# EAGLE board microm_schem2 (EAGLE 9.6.2)
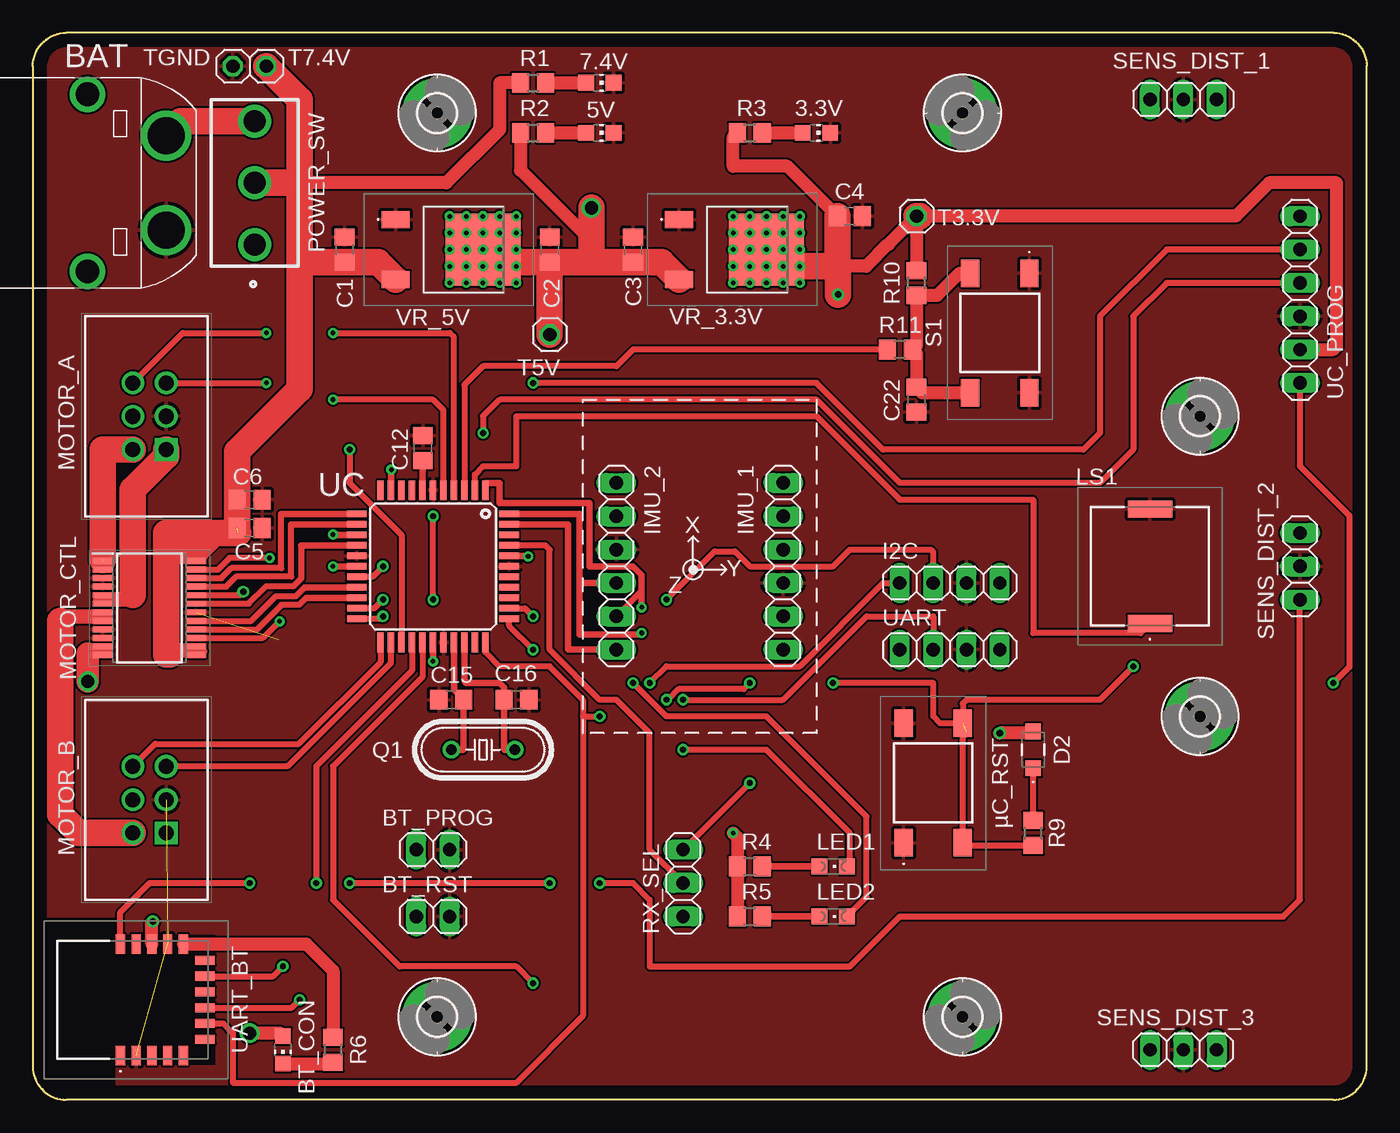
[diagram p0: board, top side]
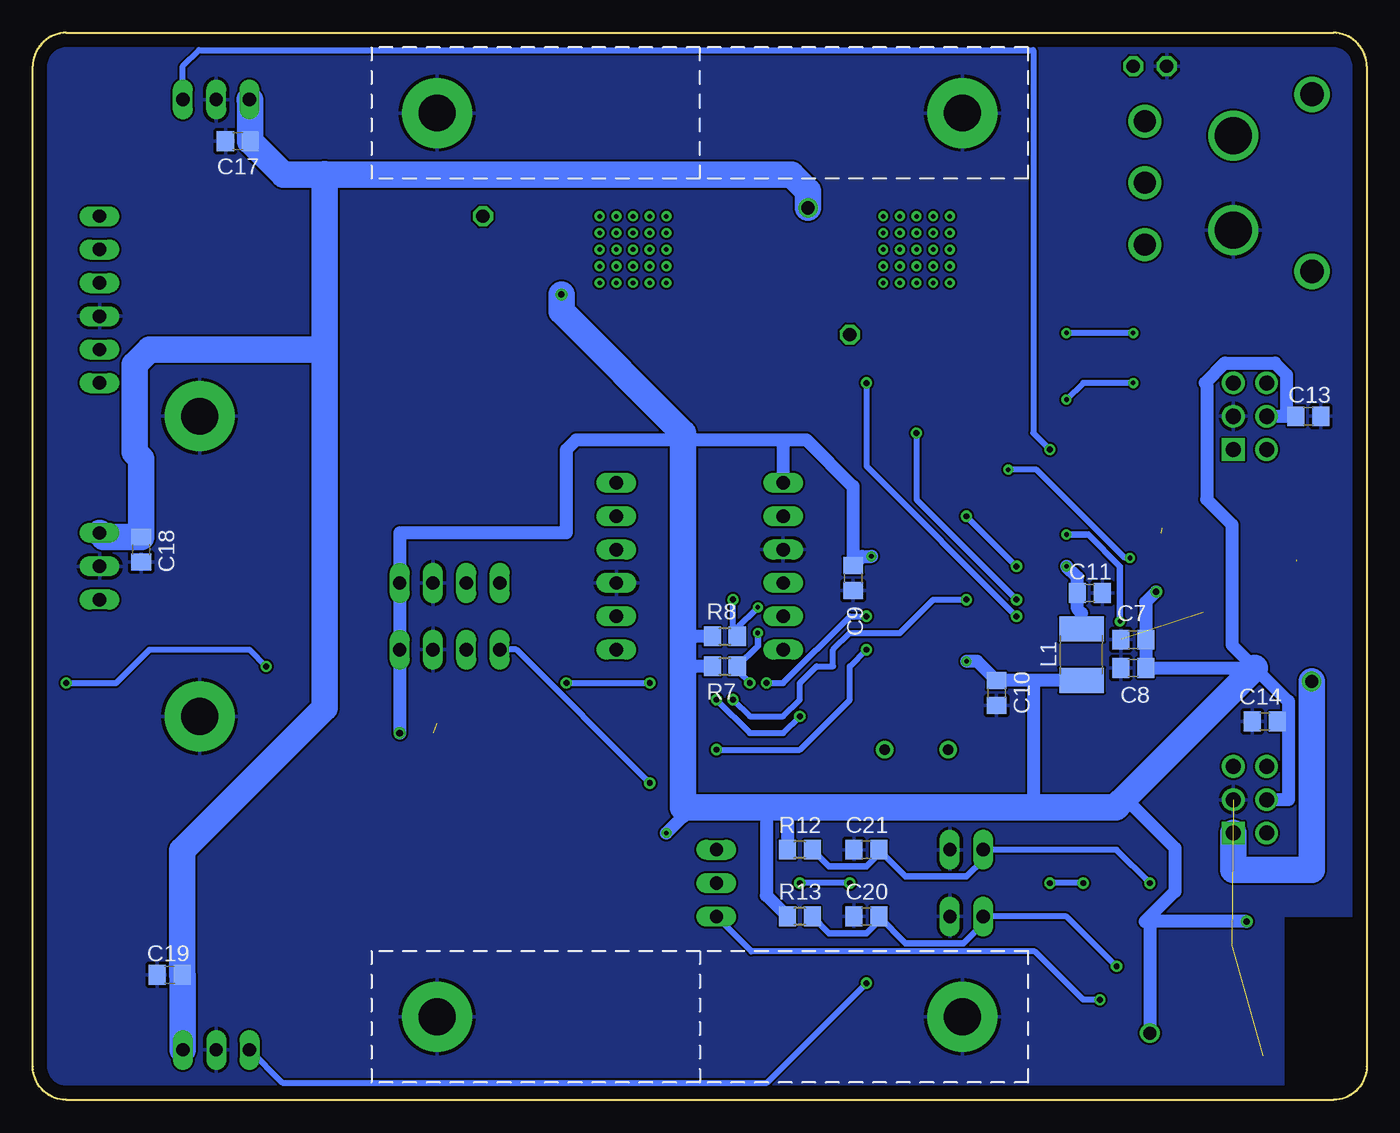
[diagram p1: board, bottom side, seen from below]

Size 101.6 x 81.28 mm. Coordinates in mm from the lower left corner, seen from the top.
Outline: 99.06,0 2.54,0 arc-90 0,2.54 0,78.74 arc-90 2.54,81.28 99.06,81.28 arc-90 101.6,78.74 101.6,2.54 arc-90 99.06,0
Copper layers (1*16): Top 0.035mm / dielectric 1.5mm / Bottom 0.035mm
Design rules "default": minimum track width 6mil, minimum drill 0.35mm, track to track 6mil, track to pad 6mil, pad to pad 6mil, via to via 6mil, smd to smd 6mil, copper to edge 40mil, drill to drill 6mil, minimum pad ring 10mil, minimum via ring 8mil, stop-mask expansion 4mil, vias tented up to drill 0mil, thermal gap 10mil

## Footprints (pad centres in the part's own frame; a part is rotated, then mirrored left to right if it is on the bottom)
CHIP-LED0805 = smd 1.2 x 1.2: A 0,-1.05; C 0,1.05
XT60PW-M = drill 2.8: + 3.6,0; - -3.6,0 | drill 1.8: P$3 -6.75,6; P$4 6.75,6
1X02 = drill 1.016 long: 1 -1.27,0; 2 1.27,0
C0805 = smd 1.3 x 1.5: 1 -0.95,0; 2 0.95,0
PMEG4010ER115 = smd 1.2 x 1.2: 1 -1.4,0; 2 1.4,0
2,8-PAD = drill 2.8 pad 5.334: B2,8 0,0
1X04 = drill 1.016 long: 1 -3.81,0; 2 -1.27,0; 3 1.27,0; 4 3.81,0
1X06 = drill 1.016 long: 1 -6.35,0; 2 -3.81,0; 3 -1.27,0; 4 1.27,0; 5 3.81,0; 6 6.35,0
L1812 = smd 1.9 x 3.4: 1 -1.95,0; 2 1.95,0
CHIPLED_0805 = smd 1.2 x 1.2: A 0,-1.05; C 0,1.05
CPT9019ASMTTR = smd 1.3 x 3.4: 1 -4.35,0; 2 4.35,0
SHDR6W67P254_2X3_1524X916X922P = drill 1.15 pad 1.725 square: 1 0,0 | drill 1.15 pad 1.725: 2 0,2.54; 3 2.54,0; 4 2.54,2.54; 5 5.08,0; 6 5.08,2.54
SOP65P760X160-24N = smd 1.525 x 0.45: 1 -3.562,3.575; 2 -3.562,2.925; 3 -3.562,2.275; 4 -3.562,1.625; 5 -3.562,0.975; 6 -3.562,0.325; 7 -3.562,-0.325; 8 -3.562,-0.975; 9 -3.562,-1.625; 10 -3.562,-2.275; 11 -3.562,-2.925; 12 -3.562,-3.575; 13 3.562,-3.575; 14 3.562,-2.925; 15 3.562,-2.275; 16 3.562,-1.625; 17 3.562,-0.975; 18 3.562,-0.325; 19 3.562,0.325; 20 3.562,0.975; 21 3.562,1.625; 22 3.562,2.275; 23 3.562,2.925; 24 3.562,3.575
1000-SERIES(SPDT) = drill 1.68 pad 2.48: 1 0,-4.7; 2 0,0; 3 0,4.7
HC49/S = drill 0.813: 1 -2.413,0; 2 2.413,0
R0805 = smd 1.3 x 1.5: 1 -0.95,0; 2 0.95,0
1X03 = drill 1.016 long: 1 -2.54,0; 2 0,0; 3 2.54,0
TS046650BK100SMTTR = smd 2.1 x 1.4: 1 -4.55,2.25; 2 -4.55,-2.25; 3 4.55,2.25; 4 4.55,-2.25
1X01 = drill 1.016 octagon: 1 0,0
RN4871IRM140 = smd 1.5 x 0.7: 1 -4.25,0.95; 2 -4.25,-0.25; 3 -4.25,-1.45; 4 -4.25,-2.65; 5 -4.25,-3.85; 12 4.25,-3.85; 13 4.25,-2.65; 14 4.25,-1.45; 15 4.25,-0.25; 16 4.25,0.95 | smd 0.7 x 1.5: 6 -3,-5.5; 7 -1.8,-5.5; 8 -0.6,-5.5; 9 0.6,-5.5; 10 1.8,-5.5; 11 3,-5.5
TQFP44 = smd 1.5 x 0.5: 1 -5.8,4; 2 -5.8,3.2; 3 -5.8,2.4; 4 -5.8,1.6; 5 -5.8,0.8; 6 -5.8,0; 7 -5.8,-0.8; 8 -5.8,-1.6; 9 -5.8,-2.4; 10 -5.8,-3.2; 11 -5.8,-4; 23 5.8,-4; 24 5.8,-3.2; 25 5.8,-2.4; 26 5.8,-1.6; 27 5.8,-0.8; 28 5.8,0; 29 5.8,0.8; 30 5.8,1.6; 31 5.8,2.4; 32 5.8,3.2; 33 5.8,4 | smd 0.5 x 1.5: 12 -4,-5.8; 13 -3.2,-5.8; 14 -2.4,-5.8; 15 -1.6,-5.8; 16 -0.8,-5.8; 17 0,-5.8; 18 0.8,-5.8; 19 1.6,-5.8; 20 2.4,-5.8; 21 3.2,-5.8; 22 4,-5.8; 34 4,5.8; 35 3.2,5.8; 36 2.4,5.8; 37 1.6,5.8; 38 0.8,5.8; 39 0,5.8; 40 -0.8,5.8; 41 -1.6,5.8; 42 -2.4,5.8; 43 -3.2,5.8; 44 -4,5.8
LM1117DTX33NOPB = smd 2.15 x 1.3: 1 -4.122,2.285; 3 -4.122,-2.285 | smd 5.7 x 5.5: 4 2.543,0
LM78M05CDT = smd 2.15 x 1.3: 1 -4.122,2.285; 2 -4.122,-2.285 | smd 5.7 x 5.5: 3 2.543,0

## Placement (x,y rotation side)
3.3V  green, 2mA, 3V  [CHIP-LED0805]  59.69,73.66 270 top
5V  green, 2mA, 3V  [CHIP-LED0805]  43.18,73.66 270 top
7.4V  green, 2mA, 3V  [CHIP-LED0805]  43.18,77.47 270 top
BAT  XT60PW-M  [XT60PW-M]  10.16,69.85 90 top
BT_CON  blue, 2mA, 3V  [CHIP-LED0805]  19.05,3.81 180 top
BT_PROG  [1X02]  30.48,19.05 0 top
BT_RST  [1X02]  30.48,13.97 0 top
C1  10uF, tantalum  [C0805]  23.75,64.77 90 top
C2  22uF, tantalum, esr 0.3-22Ω  [C0805]  39.37,64.77 90 top
C3  10uF, tantalum  [C0805]  45.72,64.77 90 top
C4  22uF, tantalum, esr 0.3-22Ω  [C0805]  62.23,67.31 0 top
C5  100nF  [C0805]  16.51,43.56 0 top
C6  10uF  [C0805]  16.51,45.72 0 top
C7  100nF  [C0805]  17.78,35.05 180 bottom
C8  10uF  [C0805]  17.78,32.89 180 bottom
C9  100nF, 10-20V, low-esr  [C0805]  39.12,39.75 270 bottom
C10  100nF, 10-20V, low-esr  [C0805]  28.19,30.99 270 bottom
C11  100nF, 10-20V, low-esr  [C0805]  21.08,38.61 180 bottom
C12  10uF, 10-20V, low-esr  [C0805]  29.72,49.66 270 top
C13  100nF, 10-20V, low-esr  [C0805]  4.45,52.07 0 bottom
C14  100nF, 10-20V, low-esr  [C0805]  7.75,28.83 180 bottom
C15  20pF, low-esr, ceramic  [C0805]  31.88,30.48 180 top
C16  20pF, low-esr, ceramic  [C0805]  36.83,30.48 0 top
C17  10 uF  [C0805]  85.98,73.03 180 bottom
C18  10 uF  [C0805]  93.34,41.91 270 bottom
C19  10 uF  [C0805]  91.19,9.53 180 bottom
C20  1uF  [C0805]  38.1,13.97 180 bottom
C21  1uF  [C0805]  38.1,19.05 180 bottom
C22  100nF  [C0805]  67.31,53.34 270 top
D2  PMEG4010ER,115  [PMEG4010ER115]  76.2,26.67 90 top
H3  MOUNT-PAD-ROUND2.8  [2,8-PAD]  30.8,75.17 0 top
H4  MOUNT-PAD-ROUND2.8  [2,8-PAD]  70.8,75.17 90 top
H5  MOUNT-PAD-ROUND2.8  [2,8-PAD]  30.8,6.33 0 top
H6  MOUNT-PAD-ROUND2.8  [2,8-PAD]  70.8,6.33 0 top
H7  MOUNT-PAD-ROUND2.8  [2,8-PAD]  88.9,52.07 0 top
H8  MOUNT-PAD-ROUND2.8  [2,8-PAD]  88.9,29.21 0 top
I2C  [1X04]  69.85,39.37 0 top
IMU_1  [1X06]  57.15,40.64 270 top
IMU_2  [1X06]  44.45,40.64 270 top
L1  47uH  [L1812]  21.72,33.91 270 bottom
LED1  red, 2mA, 2.1V  [CHIPLED_0805]  60.96,17.78 270 top
LED2  red, 2mA, 2.1V  [CHIPLED_0805]  60.96,13.97 270 top
LS1  CPT-9019A-SMT-TR  [CPT9019ASMTTR]  85.09,40.64 90 top
MOTOR_A  1761681-1  [SHDR6W67P254_2X3_1524X916X922P]  10.16,49.53 90 top
MOTOR_B  1761681-1  [SHDR6W67P254_2X3_1524X916X922P]  10.16,20.32 90 top
MOTOR_CTL  TB6612FNG,C,8,EL  [SOP65P760X160-24N]  8.89,37.47 0 top
POWER_SW  1101M2S3CQE2  [1000-SERIES(SPDT)]  16.89,69.85 0 top
Q1  16 MHz  [HC49/S]  34.29,26.67 0 top
R1  2.7kΩ  [R0805]  38.1,77.47 0 top
R2  1.2kΩ  [R0805]  38.1,73.66 0 top
R3  180Ω  [R0805]  54.61,73.66 0 top
R4  680Ω  [R0805]  54.61,17.78 0 top
R5  680Ω  [R0805]  54.61,13.97 0 top
R6  180Ω  [R0805]  22.86,3.81 270 top
R7  2.2kΩ  [R0805]  48.9,33.02 0 bottom
R8  2.2kΩ  [R0805]  48.9,35.31 0 bottom
R9  10kΩ  [R0805]  76.2,20.32 90 top
R10  10kΩ  [R0805]  67.31,62.23 90 top
R11  1kΩ  [R0805]  66.04,57.15 180 top
R12  10kΩ  [R0805]  43.18,19.05 180 bottom
R13  10kΩ  [R0805]  43.18,13.97 180 bottom
RX_SEL  [1X03]  49.53,16.51 90 top
S1  TS04-66-50-BK-100-SMT-TR  [TS046650BK100SMTTR]  73.66,58.42 270 top
SENS_DIST_1  [1X03]  87.63,76.2 0 top
SENS_DIST_2  [1X03]  96.52,40.64 270 top
SENS_DIST_3  [1X03]  87.63,3.81 180 top
T3.3V  [1X01]  67.31,67.31 0 top
T5V  [1X01]  39.37,58.29 0 top
T7.4V  [1X01]  17.78,78.74 0 top
TGND  [1X01]  15.24,78.74 0 top
UART  [1X04]  69.85,34.29 0 top
UART_BT  RN4871-I_RM140  [RN4871IRM140]  7.62,7.62 90 top
UC  DSPIC33FJ64MC804-PT  [TQFP44]  30.48,40.64 270 top
UC_PROG  [1X06]  96.52,60.96 90 top
VR_3.3V  LM1117DTX-3.3_NOPB  [LM1117DTX33NOPB]  53.34,64.77 0 top
VR_5V  LM1117DTX-5.0_NOPB  [LM78M05CDT]  31.75,64.77 0 top
µC_RST  TS04-66-50-BK-100-SMT-TR  [TS046650BK100SMTTR]  68.58,24.13 90 top

## Library data of the parts
3.3V 5V 7.4V BT_CON LED1 LED2 = led
BAT = amass
BT_PROG BT_RST I2C IMU_1 IMU_2 RX_SEL SENS_DIST_1-SENS_DIST_3 T3.3V T5V T7.4V TGND UART UC_PROG = pinhead
C1-C22 = rcl; SPICEPREFIX: C
D2 = SamacSys_Parts; DESCRIPTION: Nexperia 40V 1A, Diode, 2-Pin SOD-123 PMEG4010ER,115; HEIGHT: 1.1mm; MANUFACTURER_NAME: Nexperia; MANUFACTURER_PART_NUMBER: PMEG4010ER,115; MOUSER_PART_NUMBER: 771-PMEG4010ER115; MOUSER_PRICE-STOCK: https://www.mouser.co.uk/ProductDetail/Nexperia/PMEG4010ER115?qs=LMSg3oBIm%2FgUK9jNVC9MaQ%3D%3D
H3-H8 = holes
L1 = rcl; SPICEPREFIX: L
LS1 = SamacSys_Parts; ARROW_PART_NUMBER: CPT-9019A-SMT-TR; ARROW_PRICE-STOCK: https://www.arrow.com/en/products/cpt-9019a-smt-tr/same-sky-(formerly-cui-devices)?utm_currency=USD&region=nac; DESCRIPTION: 9 mm, 25 Vp-p Vdc, 75 dB, Surface Mount (SMT), Piezo Audio Transducer Buzzer; HEIGHT: 2.1mm; MANUFACTURER_NAME: Same Sky; MANUFACTURER_PART_NUMBER: CPT-9019A-SMT-TR; MOUSER_PART_NUMBER: 179-CPT-9019A-SMT-TR; MOUSER_PRICE-STOCK: https://www.mouser.co.uk/ProductDetail/Same-Sky/CPT-9019A-SMT-TR?qs=3Rah4i%252BhyCH9W9p08uaaRg%3D%3D
MOTOR_A MOTOR_B = SamacSys_Parts; DESCRIPTION: Body Features: Primary Product Color Black | Connector Profile Low | Daisy Chain With | Configuration Features: PCB Mount Orientation Vertical | Number of Positions 6 | Number of Rows 2 | Contact Features: Contact Mating Area Plating Material Thickness 15 MICIN | Contact Type Pin | PCB Contact Termination Area Plating Material Tin | Contact Base Material Phosphor Bronze | PCB Contact Termination Area Plating Material Thickness 100 MICIN | Contact Current Rating (Max) 1 AMP | Contact Underplating Material Ni; HEIGHT: 9.22mm; MANUFACTURER_NAME: TE Connectivity; MANUFACTURER_PART_NUMBER: 1761681-1; MOUSER_PART_NUMBER: 571-1761681-1; MOUSER_PRICE-STOCK: https://www.mouser.co.uk/ProductDetail/TE-Connectivity/1761681-1?qs=BqFpTYCQ3dLAeZ2wzdz7aw%3D%3D
MOTOR_CTL = SamacSys_Parts; DESCRIPTION: otor / Motion / Ignition Controllers & Drivers Brush Motor Driver IC; HEIGHT: 1.6mm; MANUFACTURER_NAME: Toshiba; MANUFACTURER_PART_NUMBER: TB6612FNG,C,8,EL; MOUSER_PART_NUMBER: 757-TB6612FNGC8EL; MOUSER_PRICE-STOCK: https://www.mouser.co.uk/ProductDetail/Toshiba/TB6612FNGC8EL?qs=rsevcuukUAy2UalRuv4E%2FQ%3D%3D
POWER_SW = SamacSys_Parts; ARROW_PART_NUMBER: 1101M2S3CQE2; ARROW_PRICE-STOCK: https://www.arrow.com/en/products/1101m2s3cqe2/ck?utm_currency=USD&region=europe; DESCRIPTION: 1101M2S3CQE2 (Slide Switches); HEIGHT: mm; MANUFACTURER_NAME: C & K COMPONENTS; MANUFACTURER_PART_NUMBER: 1101M2S3CQE2; MOUSER_PART_NUMBER: 611-1101M2S3CQE2; MOUSER_PRICE-STOCK: https://www.mouser.co.uk/ProductDetail/CK/1101M2S3CQE2?qs=C4UUOezh8MStnZqkTHGAfQ%3D%3D
Q1 = crystal; OC_FARNELL: 1667008; OC_NEWARK: unknown
R1-R13 = rcl; SPICEPREFIX: R
S1 µC_RST = SamacSys_Parts; DESCRIPTION: 6 x 6 mm, 5 mm Actuator Height, 160 gf, Black, Surface Mount, SPST, Tactile Switch; HEIGHT: 5mm; MANUFACTURER_NAME: Same Sky; MANUFACTURER_PART_NUMBER: TS04-66-95-BK-160-SMT-TR; MOUSER_PART_NUMBER: 179-TS046695BK160SMR; MOUSER_PRICE-STOCK: https://www.mouser.co.uk/ProductDetail/Same-Sky/TS04-66-95-BK-160-SMT-TR?qs=VJzv269c%252BPZ4T0IrjAQJjg%3D%3D
UART_BT = SamacSys_Parts; ARROW_PART_NUMBER: RN4871-I/RM140; ARROW_PRICE-STOCK: https://www.arrow.com/en/products/rn4871-irm140/microchip-technology?utm_currency=USD&region=nac; DESCRIPTION: Bluetooth Modules (802.15.1) Bluetooth Low Energy BLE Module, Shielded, Antenna, ASCII Interface, 9x11.5mm; HEIGHT: 2.1mm; MANUFACTURER_NAME: Microchip; MANUFACTURER_PART_NUMBER: RN4871-I/RM140; MOUSER_PART_NUMBER: 579-RN4871-I/RM140; MOUSER_PRICE-STOCK: https://www.mouser.co.uk/ProductDetail/Microchip-Technology/RN4871-I-RM140?qs=BJlw7L4Cy79OHrwBC2yoPQ%3D%3D
UC = microchip-dspic33fjxxmc
VR_3.3V = SamacSys_Parts; ARROW_PART_NUMBER: LM1117DTX-3.3/NOPB; ARROW_PRICE-STOCK: https://www.arrow.com/en/products/lm1117dtx-3.3nopb/texas-instruments?utm_currency=USD&region=nac; DESCRIPTION: Space saving 800-mA low-dropout linear regulator with internal current limit; HEIGHT: mm; MANUFACTURER_NAME: Texas Instruments; MANUFACTURER_PART_NUMBER: LM1117DTX-3.3/NOPB; MOUSER_PART_NUMBER: 926-LM1117DTX3.3NOPB; MOUSER_PRICE-STOCK: https://www.mouser.co.uk/ProductDetail/Texas-Instruments/LM1117DTX-3.3-NOPB?qs=X1J7HmVL2ZFMDtR97FJi7A%3D%3D
VR_5V = SamacSys_Parts; ARROW_PART_NUMBER: LM1117DTX-5.0/NOPB; ARROW_PRICE-STOCK: https://www.arrow.com/en/products/lm1117dtx-5.0nopb/texas-instruments?utm_currency=USD&region=nac; DESCRIPTION: Space saving 800-mA low-dropout linear regulator with internal current limit; HEIGHT: mm; MANUFACTURER_NAME: Texas Instruments; MANUFACTURER_PART_NUMBER: LM1117DTX-5.0/NOPB; MOUSER_PART_NUMBER: 926-LM1117DTX50NOPB; MOUSER_PRICE-STOCK: https://www.mouser.co.uk/ProductDetail/Texas-Instruments/LM1117DTX-5.0-NOPB?qs=X1J7HmVL2ZGetRa19U64lA%3D%3D

## Nets
+3V3: BT_CON.A C4.1 C7.1 C8.1 C9.1 C10.1 C13.1 C14.1 D2.2 I2C.4 IMU_2.1 L1.2 MOTOR_A.4 MOTOR_B.4 MOTOR_CTL.20 R3.1 R4.1 R5.1 R7.1 R8.1 R10.2 R12.2 R13.2 T3.3V.1 UART.4 UART_BT.14 UC.28 UC.40 UC_PROG.2 VR_3.3V.4
+5V: C2.1 C3.1 C17.1 C18.1 C19.1 R2.1 SENS_DIST_1.1 SENS_DIST_2.1 SENS_DIST_3.1 T5V.1 VR_3.3V.3 VR_5V.3
+7V4: C1.1 C5.1 C6.1 MOTOR_CTL.13 MOTOR_CTL.14 MOTOR_CTL.24 POWER_SW.2 R1.1 T7.4V.1 VR_5V.2
BT_PROG: BT_PROG.1 C21.1 R12.1 UART_BT.16
BT_RESET: BT_RST.1 C20.1 R13.1 UART_BT.10
BT_STATUS: R6.1 UART_BT.12
BUTTON1: R11.2 UC.3
BUZZ_PWM: LS1.1 UC.2
GND: 3.3V.C 5V.C 7.4V.C BAT.- BT_PROG.2 BT_RST.2 C1.2 C2.2 C3.2 C4.2 C5.2 C6.2 C7.2 C8.2 C9.2 C10.2 C11.1 C12.1 C13.2 C14.2 C15.2 C16.2 C17.2 C18.2 C19.2 C20.2 C21.2 C22.2 H3.B2,8 H4.B2,8 H5.B2,8 H6.B2,8 H7.B2,8 H8.B2,8 I2C.3 IMU_1.4 IMU_2.3 LS1.2 MOTOR_A.3 MOTOR_B.3 MOTOR_CTL.3 MOTOR_CTL.4 MOTOR_CTL.9 MOTOR_CTL.10 MOTOR_CTL.18 S1.1 S1.3 SENS_DIST_1.2 SENS_DIST_2.2 SENS_DIST_3.2 TGND.1 UART.3 UART_BT.2 UART_BT.13 UC.6 UC.16 UC.29 UC.39 UC_PROG.3 VR_3.3V.1 VR_5V.1 µC_RST.1 µC_RST.3
I2C_SCL: I2C.1 IMU_2.4 R7.2 UC.44
I2C_SDA: I2C.2 IMU_2.5 R8.2 UC.1
IMU_INT: IMU_2.6 UC.43
LED1: LED1.C UC.34
LED2: LED2.C UC.35
M_STDBY: MOTOR_CTL.19 UC.15
MA_DIR1: MOTOR_CTL.21 UC.13
MA_DIR2: MOTOR_CTL.22 UC.12
MA_ENC_A: MOTOR_A.6 UC.4
MA_ENC_B: MOTOR_A.5 UC.5
MA_OUT1: MOTOR_A.2 MOTOR_CTL.1 MOTOR_CTL.2
MA_OUT2: MOTOR_A.1 MOTOR_CTL.5 MOTOR_CTL.6
MA_PWM: MOTOR_CTL.23 UC.10
MB_DIR1: MOTOR_CTL.17 UC.19
MB_DIR2: MOTOR_CTL.16 UC.20
MB_ENC_A: MOTOR_B.5 UC.24
MB_ENC_B: MOTOR_B.6 UC.23
MB_OUT1: MOTOR_B.1 MOTOR_CTL.11 MOTOR_CTL.12
MB_OUT2: MOTOR_B.2 MOTOR_CTL.7 MOTOR_CTL.8
MB_PWM: MOTOR_CTL.15 UC.14
MCLR: R9.1 UC.18 UC_PROG.1 µC_RST.2 µC_RST.4
N$1: BT_CON.C R6.2
N$2: BAT.+ POWER_SW.3
N$3: LED1.A R4.2
N$4: 7.4V.A R1.2
N$5: C11.2 L1.1 UC.17
N$6: C22.1 R10.1 R11.1 S1.2 S1.4
N$7: D2.1 R9.2
N$8: LED2.A R5.2
N$16: 5V.A R2.2
N$17: 3.3V.A R3.2
OSC1: C15.1 Q1.1 UC.30
OSC2: C16.1 Q1.2 UC.31
PG_EC1: UC.22 UC_PROG.5
PG_ED1: UC.21 UC_PROG.4
SENS_DIST_1: SENS_DIST_1.3 UC.25
SENS_DIST_2: SENS_DIST_2.3 UC.26
SENS_DIST_3: SENS_DIST_3.3 UC.27
UART_BT_RX: RX_SEL.1 UART_BT.8
UART_BT_RX_IND: UART_BT.6
UART_DBG_RX: RX_SEL.3 UART.1
UART_RX: RX_SEL.2 UC.41
UART_TX: UART.2 UART_BT.7 UC.33
VCAP/VDDCORE: C12.2 UC.7

## Tracks (layer width: path | path; a pad name or v marks a point on that pad's centre or on a via)
+3V3  (via drill 0.35, 0.35 pad 0.55, 0.5 pad 0.55, 1)
  Top 0.45: MOTOR_CTL.20 15.77,38.44 | T3.3V.1 67.56,67.32
  Top 0.5: 15.77,38.44 v16.04,38.7
  Top 0.508: UC.40 37.68,41.44 v37.72,41.4 | UC.28 v30.48,33.4
  Top 1: 60.96,63.5 61.28,63.82 | C4.1 57.47,71.12 53.34,71.12 53.34,73.34 R3.1 | 60.96,63.5 63.48,63.5 65.15,65.17 65.17,65.17 T3.3V.1 R10.2 | UC_PROG.2 99.06,57.15 99.31,57.4 99.31,69.85 94.17,69.85 91.64,67.32 67.56,67.32 | 60.96,63.5 61.34,63.12 | D2.2 76.07,27.94 v73.66,27.94 | UART_BT.14 9.07,13.52 v9.14,13.59 | v53.34,20.32 53.66,20 R4.1 R5.1 | BT_CON.A 18.83,5.08 v16.51,5.08
  Top 2: VR_3.3V.4 57.15,63.5 60.96,63.5 | C4.1 61.28,63.82 | T3.3V.1 67.55,67.31 67.56,67.32 | 61.34,63.12 v61.34,61.34
  Bottom 1: C7.1 16.76,35.05 | 6.11,52.07 6.11,55.24 6.99,56.12 10.79,56.12 12.3,54.61 12.19,54.5 12.19,45.74 10.27,43.81 10.27,34.65 8.51,32.89 | 5.97,28.83 5.97,30.35 8.51,32.89 | MOTOR_B.4 5.97,22.86 5.97,28.45 | v73.66,27.94 UART.4 I2C.4 73.66,43.18 60.96,43.18 60.96,49.53 60.2,50.29 52.07,50.29 44.45,50.29 | C14.1 6.35,28.83 | 6.35,28.83 5.97,28.83 | C13.1 6.11,52.07 | 6.11,52.07 MOTOR_A.4 7.62,51.67 | 6.35,28.83 5.97,28.45 | 5.97,28.83 5.97,28.45 | v16.04,38.7 16.83,37.91 C7.1 | C7.1 C8.1 8.51,32.89 | 21.79,31.88 L1.2 25.4,31.96 | v37.72,41.4 38.41,41.4 C9.1 39.12,46.74 42.67,50.29 44.45,50.29 | 25.4,31.96 28.17,31.96 C10.1 29.66,33.4 v30.48,33.4 | v9.14,13.59 16.89,13.59 16.51,13.97 | 16.51,13.97 14.61,15.88 14.61,19.18 18.16,22.73 18.67,22.73 | R8.1 51.82,35.31 52.07,35.05 | R7.1 52.07,33.02 | 25.4,31.96 25.4,22.29 | 44.45,50.29 IMU_2.1 | 45.72,22.29 45.72,15.56 R13.2 | 44.45,22.29 44.13,21.97 R12.2 | 52.07,22.29 52.07,21.59 v53.34,20.32 | 16.51,13.97 v16.51,5.08
  Bottom 2: v61.34,61.34 61.34,60.07 52.07,50.8 52.07,50.29 52.07,35.05 52.07,33.02 52.07,22.29 45.72,22.29 44.45,22.29 25.4,22.29 19.12,22.29 18.67,22.73 8.51,32.89
+5V  (via drill 1)
  Top 1: R2.1 37.15,70.8 42.55,65.41 42.55,64.45 41.91,63.82
  Top 2: VR_5V.3 35.24,63.82 C2.1 | C2.1 41.91,63.82 42.55,63.82 | 42.55,63.82 C3.1 47.88,63.82 VR_3.3V.3 | C2.1 T5V.1 | v42.55,67.94 42.55,63.82
  Bottom 2: 79.38,57.15 92.71,57.15 93.84,56.02 93.84,49.33 93.34,48.83 C18.1 96.2,42.86 SENS_DIST_2.1 | 79.38,57.15 79.38,29.84 90.24,18.98 C19.1 90.17,9.46 SENS_DIST_3.1 | v42.55,67.94 42.55,69.22 43.81,70.48 79.38,70.48 | 79.38,57.15 79.38,70.48 | 79.38,70.48 79.38,70.49 | 79.38,70.48 82.49,70.48 C17.1 85.03,76.14 SENS_DIST_1.1
+7V4  (1 unrouted)
  Top 0.45: 10.16,34.29 10.41,34.54 MOTOR_CTL.14 12.45,34.29 | MOTOR_CTL.13 10.54,33.89 | 10.54,33.89 10.43,33.89 | MOTOR_CTL.13 12.45,34.29 | 12.45,34.29 10.94,34.29 10.54,33.89 | MOTOR_CTL.13 12.72,34.16 13.08,34.16 | 12.7,43.18 12.45,42.93 12.45,41.78 MOTOR_CTL.24 12.43,41.02 10.16,41.02
  Top 0.5: 15.16,43.96 C5.1
  Top 1: R1.1 35.56,77.47 35.56,73.91 31.5,69.85 20.32,69.85
  Top 1.6: 10.43,33.89 10.41,33.91
  Top 1.7: 13.97,43.18 12.57,41.78 12.45,41.78 12.2,42.04 10.16,42.04
  Top 2: T7.4V.1 20.32,76.2 20.32,69.85 | 20.32,69.85 POWER_SW.2 | 20.32,63.5 20.32,54.15 15.56,49.39 C6.1 C5.1 | 20.32,63.5 20.32,69.85 | 10.41,33.91 10.16,33.91 10.16,34.29 10.16,41.02 10.16,42.04 10.16,43.18 12.7,43.18 13.97,43.18 15.66,43.18 | 20.32,63.5 20.64,63.82 C1.1 26.29,63.82 VR_5V.2
BT_PROG  (via drill 0.45)
  Top 0.45: UART_BT.16 6.67,14.29 8.89,16.51 v16.51,16.51
  Bottom 0.45: v16.51,16.51 19.05,19.05 BT_PROG.1
  Bottom 0.5: R12.1 42.11,19.17
  Bottom 0.508: R12.1 40.96,17.78 38.1,17.78 37.15,18.73 C21.1 35.12,17.02 30.48,17.02 29.21,18.29 BT_PROG.1
BT_RESET  (via drill 0.45)
  Top 0.45: UART_BT.10 18.31,9.42 v19.05,10.16
  Bottom 0.45: v19.05,10.16 22.86,13.97 BT_RST.1
  Bottom 0.5: 37.15,14.04 C20.1 | R13.1 42.11,14.09
  Bottom 0.508: R13.1 40.96,12.7 38.1,12.7 37.15,13.65 C20.1 35.12,11.94 30.73,11.94 29.21,13.46 BT_RST.1
BT_STATUS
  Top 1: UART_BT.12 20.83,11.87 22.86,9.84 R6.1
BUTTON1
  Top 0.45: R11.2 45.72,57.15 44.45,55.88 34.29,55.88 32.88,54.47 UC.3
BUZZ_PWM
  Top 0.45: UC.2 33.68,47.65 34.29,48.26 36.83,48.26 36.83,52.07 59.69,52.07 66.04,45.72 76.2,45.72 76.2,35.56 84.36,35.56 LS1.1
GND  (3 unrouted)
  pour Bottom: 2.54,81.28 arc90 0,78.74 0,16.51 0,15.24 0,13.97 6.35,13.97 6.35,0 99.06,0 arc90 101.6,2.54 101.6,78.74 arc90 99.06,81.28 97.79,81.28
  pour Top: 0,78.74 0,13.97 6.35,13.97 6.35,12.7 13.97,12.7 13.97,2.54 6.35,2.54 6.35,0 99.06,0 arc90 101.6,2.54 101.6,3.81 101.6,78.74 arc90 99.06,81.28 97.79,81.28 2.54,81.28 arc90
I2C_SCL  (via drill 0.35 pad 0.55, 0.45)
  Top 0.45: v46.99,31.75 48.26,33.02 58.42,33.02 64.77,39.37 I2C.1
  Top 0.5: UC.44 41.66,44.64 41.66,39.37 | 41.66,39.37 IMU_2.4 | v46.38,35.56 46.27,35.45 43.21,35.45 43.18,35.43 41.66,35.43 41.66,39.37
  Bottom 0.45: R7.2 47.95,32.7 v46.99,31.75
  Bottom 0.5: v46.38,35.56 46.38,34.59 R7.2
I2C_SDA  (via drill 0.35 pad 0.55, 0.45)
  Top 0.45: I2C.2 68.58,41.74 68.54,41.78 68.41,41.91 62.23,41.91 60.96,40.64 54.61,40.64 53.47,41.78 51.94,41.78 v48.26,38.1
  Top 0.5: IMU_2.5 46.38,38.76 | 46.38,38.76 46.38,39.98 45.72,40.64 42.42,40.64 42.42,45.47 35.56,45.47 35.56,46.99 34.48,46.99 UC.1 | v46.38,37.51 46.38,38.76
  Bottom 0.45: R8.2 48.26,35.62 v48.26,38.1
  Bottom 0.5: R8.2 47.95,35.94 v46.38,37.51
IMU_INT
  Top 0.5: UC.43 40.75,43.84 40.75,34.31 40.77,34.29 IMU_2.6
LED1  (via drill 0.45)
  Top 0.45: LED1.C 62.23,18 62.23,20.32 55.88,26.67 v49.53,26.67 | v38.1,34.29 36.28,36.11 UC.34
  Bottom 0.45: v49.53,26.67 43.18,26.67 39.37,30.48 39.37,33.02 v38.1,34.29
LED2  (via drill 0.45)
  Top 0.45: LED2.C 63.5,15.46 63.5,21.59 55.88,29.21 48.26,29.21 v45.72,31.75 | UC.35 37.49,37.44 v38.1,36.83
  Bottom 0.45: v38.1,36.83 39.37,36.83 44.45,31.75 v45.72,31.75
M_STDBY
  Top 0.45: 20.45,42.24 20.45,39.73 19.84,39.12 17.78,39.12 16.45,37.79 MOTOR_CTL.19
  Top 0.5: UC.15 20.45,42.24
MA_DIR1
  Top 0.45: MOTOR_CTL.21 14.74,39.09 15.5,39.85 19.68,39.85 19.68,43.84
  Top 0.5: 19.68,43.84 UC.13
MA_DIR2
  Top 0.45: MOTOR_CTL.22 14.36,39.74 15.12,40.5 18.92,40.5 18.92,44.64
  Top 0.5: 18.92,44.64 UC.12
MA_ENC_A  (via drill 0.35)
  Top 0.45: UC.4 32.08,58.09 31.75,58.42 v22.86,58.42 | MOTOR_A.6 11.43,58.42 v17.78,58.42
  Bottom 0.45: v17.78,58.42 v22.86,58.42
MA_ENC_B  (via drill 0.35)
  Top 0.45: MOTOR_A.5 v17.78,54.61 | UC.5 31.28,52.54 30.48,53.34 v22.86,53.34
  Bottom 0.45: v17.78,54.61 21.59,54.61 v22.86,53.34
MA_OUT1  (1 unrouted)
  Top 0.45: MOTOR_CTL.1 MOTOR_CTL.2
  Top 2: MOTOR_A.2 5.33,49.53 | 5.33,49.52 5.33,49.53 | 5.33,49.53 5.33,41.12
MA_OUT2
  Top 0.45: 7.31,37.79 MOTOR_CTL.6 5.33,38.1 | 7.62,38.44 MOTOR_CTL.5 5.33,38.1 | 5.33,38.1 7.62,38.1 | 5.33,38.1 4.83,38.1
  Top 0.5: 7.62,38.1 7.31,37.79
  Top 2: MOTOR_A.1 10.16,49.03 7.62,46.49 7.62,38.44
MA_PWM  (via drill 0.35 pad 0.55)
  Top 0.45: MOTOR_CTL.23 14.1,40.39 14.99,41.28 v18.03,41.28 v18.03,41.27
  Top 0.5: UC.10 27.28,47.98 v27.3,48.01
  Bottom 0.45: v27.3,48.01 25.15,48.01 18.41,41.27 v18.03,41.27
MB_DIR1
  Top 0.45: 20.71,39.04 20.02,38.35 18.5,38.35 17.61,37.47 | 17.61,37.47 | MOTOR_CTL.17 16.64,36.49 17.61,37.47
  Top 0.5: UC.19 20.71,39.04
MB_DIR2
  Top 0.45: 20.83,38.24 20.29,37.7 18.95,37.7 17.93,36.68 17.09,35.84 MOTOR_CTL.16
  Top 0.5: UC.20 20.83,38.24
MB_ENC_A
  Top 0.45: UC.24 27.28,33.28 19.4,25.4 MOTOR_B.5
MB_ENC_B
  Top 0.45: MOTOR_B.6 9.34,27.12 20.27,27.12 26.48,33.33 UC.23
MB_OUT1  (via drill 1)
  Top 0.45: 4.46,34.29 4.71,34.54 MOTOR_CTL.11 5.33,34.29 | 4.46,34.29 4.18,34.02 4.31,33.89 MOTOR_CTL.12 5.33,34.29 | 5.33,34.29 4.46,34.29 | 5.33,34.29 5.46,34.16 5.84,34.16
  Top 1.7: v4.19,31.88 v4.18,31.88 4.18,34.02
  Bottom 2: v4.19,31.88 4.19,17.53 10.16,17.53 MOTOR_B.1
MB_OUT2
  Top 0.45: MOTOR_CTL.7 2.02,37.14 | 2.09,36.49 MOTOR_CTL.8 5.33,36.83 | MOTOR_CTL.7 5.33,36.83 | 5.33,36.83 2.54,36.83 | MOTOR_CTL.7 5.64,36.83 5.84,36.83
  Top 0.5: 2.02,37.14 arc90 1.71,36.83 2.54,36.83
  Top 2: MOTOR_B.2 3.5,20.32 2.09,21.73 2.09,36.49
MB_PWM  (via drill 0.35 pad 0.55)
  Top 0.45: MOTOR_CTL.15 17.54,35.19 v18.8,36.45
  Top 0.5: UC.14 22.88,43.04 v22.86,43.06
  Bottom 0.5: v22.86,43.06 21.21,43.06 18.8,40.64 v18.8,36.45
MCLR  (via drill 0.45)  (1 unrouted)
  Top 0.45: UC_PROG.1 96.52,48.26 100.28,44.5 100.28,32.97 v99.06,31.75 | R9.1 71.04,19.37 µC_RST.2 70.83,27.65 71.12,27.94 | v60.96,31.75 68.58,31.75 68.58,29.21 69.11,28.68 µC_RST.4 70.83,30.19 71.12,30.48 81.28,30.48 v83.82,33.02 | v48.26,30.48 48.39,30.48 49.2,31.29 54.15,31.29 v54.61,31.75 | v30.48,38.1 v30.48,44.45 | v26.67,40.64 25.87,39.84 UC.18
  Bottom 0.45: v60.96,31.75 v54.61,31.75 | v48.26,30.48 46.99,29.21 44.45,29.21 43.18,30.48 43.18,31.75 41.91,33.02 40.64,33.02 40.64,34.29 39.37,35.56 35.56,35.56 33.02,38.1 v30.48,38.1 | v30.48,44.45 v26.67,40.64 | v99.06,31.75 95.25,31.75 92.71,34.29 85.09,34.29 v83.82,33.02
N$1
  Top 1: BT_CON.C 22.76,2.76 R6.2
N$2
  Top 2: BAT.+ 11.26,74.55 POWER_SW.3
N$3
  Top 0.5: LED1.A R4.2
N$4
  Top 1: R1.2 7.4V.A
N$5  (via drill 0.35 pad 0.55)
  Top 0.5: UC.17 v22.86,40.64
  Bottom 1: L1.1 21.72,37.08 22.03,37.4 C11.2 22.03,39.81 v22.86,40.64
N$6
  Top 1: S1.4 67.73,53.87 C22.1 67.31,56.83 R11.1 67.31,57.47 R10.1 68.9,61.28 70.59,62.97 S1.2
N$7
  Top 0.45: R9.2 D2.1
N$8
  Top 0.5: R5.2 LED2.A
N$9  (via drill 0.35)
  other vias: 31.75,66.04
N$10  (via drill 0.35)
  other vias: 31.75,64.77
N$11  (via drill 0.35)
  other vias: 31.75,63.5
N$12  (via drill 0.35)
  other vias: 33.02,63.5
N$13  (via drill 0.35)
  other vias: 33.02,64.77
N$14  (via drill 0.35)
  other vias: 33.02,66.04
N$15  (via drill 0.35)
  other vias: 34.29,66.04
N$16
  Top 1: R2.2 5V.A
N$17
  Top 1: R3.2 3.3V.A
N$18  (via drill 0.35)
  other vias: 34.29,64.77
N$19  (via drill 0.35)
  other vias: 34.29,63.5
N$20  (via drill 0.35)
  other vias: 35.56,66.04
N$21  (via drill 0.35)
  other vias: 35.56,64.77
N$22  (via drill 0.35)
  other vias: 35.56,63.5
N$23  (via drill 0.35)
  other vias: 53.34,66.04
N$24  (via drill 0.35)
  other vias: 54.61,66.04
N$25  (via drill 0.35)
  other vias: 55.88,66.04
N$26  (via drill 0.35)
  other vias: 57.15,66.04
N$27  (via drill 0.35)
  other vias: 57.15,64.77
N$28  (via drill 0.35)
  other vias: 55.88,64.77
N$29  (via drill 0.35)
  other vias: 54.61,64.77
N$30  (via drill 0.35)
  other vias: 53.34,64.77
N$31  (via drill 0.35)
  other vias: 53.34,63.5
N$32  (via drill 0.35)
  other vias: 54.61,63.5
N$33  (via drill 0.35)
  other vias: 55.88,63.5
N$34  (via drill 0.35)
  other vias: 57.15,63.5
N$35  (via drill 0.35)
  other vias: 58.42,66.04
N$36  (via drill 0.35)
  other vias: 58.42,64.77
N$37  (via drill 0.35)
  other vias: 58.42,63.5
N$38  (via drill 0.35)
  other vias: 53.34,67.31
N$39  (via drill 0.35)
  other vias: 54.61,67.31
N$40  (via drill 0.35)
  other vias: 55.88,67.31
N$41  (via drill 0.35)
  other vias: 57.15,67.31
N$42  (via drill 0.35)
  other vias: 58.42,67.31
N$43  (via drill 0.35)
  other vias: 58.42,62.23
N$44  (via drill 0.35)
  other vias: 57.15,62.23
N$45  (via drill 0.35)
  other vias: 55.88,62.23
N$46  (via drill 0.35)
  other vias: 54.61,62.23
N$47  (via drill 0.35)
  other vias: 53.34,62.23
N$48  (via drill 0.35)
  other vias: 31.75,67.31
N$49  (via drill 0.35)
  other vias: 33.02,67.31
N$50  (via drill 0.35)
  other vias: 34.29,67.31
N$51  (via drill 0.35)
  other vias: 35.56,67.31
N$52  (via drill 0.35)
  other vias: 36.83,67.31
N$53  (via drill 0.35)
  other vias: 36.83,66.04
N$54  (via drill 0.35)
  other vias: 36.83,64.77
N$55  (via drill 0.35)
  other vias: 36.83,63.5
N$56  (via drill 0.35)
  other vias: 36.83,62.23
N$57  (via drill 0.35)
  other vias: 35.56,62.23
N$58  (via drill 0.35)
  other vias: 34.29,62.23
N$59  (via drill 0.35)
  other vias: 33.02,62.23
N$60  (via drill 0.35)
  other vias: 31.75,62.23
OSC1
  Top 0.5: Q1.1 32.77,26.67 32.83,26.73 C15.1 32.08,31.23 UC.30
OSC2
  Top 0.5: Q1.2 35.94,26.67 35.88,26.73 C16.1 35.88,31.43 35.56,31.75 33.02,31.75 32.88,31.89 UC.31
PG_EC1  (via drill 0.45)
  Top 0.45: UC_PROG.5 86.36,64.77 81.28,59.69 81.28,50.8 80.01,49.53 64.77,49.53 59.69,54.61 v38.1,54.61 | v26.67,36.83 26.48,36.64 UC.22
  Bottom 0.45: v38.1,54.61 38.1,48.26 v26.67,36.83
PG_ED1  (via drill 0.45)
  Top 0.45: UC_PROG.4 86.36,62.23 83.82,59.69 83.82,49.53 81.28,46.99 66.04,46.99 59.69,53.34 35.56,53.34 34.29,52.07 v34.29,50.8 | v26.67,38.1 26.01,37.44 UC.21
  Bottom 0.45: v34.29,50.8 34.29,45.72 v26.67,38.1
SENS_DIST_1  (via drill 0.45)
  Top 0.45: UC.25 28.08,43.04 24.13,46.99 v24.13,49.53
  Bottom 0.45: SENS_DIST_1.3 90.17,78.74 88.95,79.96 25.4,79.96 25.4,50.8 v24.13,49.53
SENS_DIST_2  (via drill 0.45)
  Top 0.45: UC.26 28.88,32.69 21.59,25.4 v21.59,16.51 | v24.13,16.51 v39.37,16.51 | v43.18,16.51 45.72,16.51 46.99,15.24 46.99,10.16 62.23,10.16 66.04,13.97 95.25,13.97 96.52,15.24 SENS_DIST_2.3
  Bottom 0.45: v21.59,16.51 v24.13,16.51 | v39.37,16.51 v43.18,16.51
SENS_DIST_3  (via drill 0.45)
  Top 0.45: UC.27 29.68,32.22 22.86,25.4 22.86,15.24 27.94,10.16 36.83,10.16 v38.1,8.89
  Bottom 0.45: SENS_DIST_3.3 82.6,1.32 45.67,1.32 v38.1,8.89
UART_BT_RX  (via drill 0.45)
  Top 0.45: UART_BT.8 19.72,7.02 v20.32,7.62
  Bottom 0.45: v20.32,7.62 21.59,7.62 25.28,11.31 46.87,11.31 RX_SEL.1
UART_DBG_RX  (via drill 0.45)
  Top 0.45: RX_SEL.3 v54.61,24.13
  Bottom 0.45: v54.61,24.13 64.77,34.29 UART.1
UART_RX
  Top 0.45: UC.41 39.04,42.24 39.37,41.91 39.37,34.29 43.18,30.48 44.45,30.48 46.99,27.94 46.99,19.05 RX_SEL.2
UART_TX  (via drill 0.45)
  Top 0.45: UART_BT.7 14.5,5.82 15.24,5.08 15.24,1.32 36.83,1.32 41.91,6.4 41.91,29.21 | 41.91,29.21 41.91,30.48 39.37,33.02 35.56,33.02 34.48,34.1 UC.33 | 41.91,29.21 v43.18,29.21 | v49.53,30.48 57.15,30.48 63.5,36.83 68.58,36.83 UART.2
  Bottom 0.45: v43.18,29.21 44.45,27.94 46.99,27.94 v49.53,30.48
VCAP/VDDCORE
  Top 0.5: UC.7 29.68,48.67 C12.2

## Text on the board
tNames: X | Y | Z